# Altium PCB main.PcbDoc
Units mm, origin at the board's own origin, x right, y up, seen from the top; angles counter-clockwise.
Board outline 110.3 x 50.16 mm, 2 copper layers (Top Layer, Bottom Layer); 32 components, 29 nets, 111 pads, 8 vias.
Unrouted connection lines stored in the file: 1.
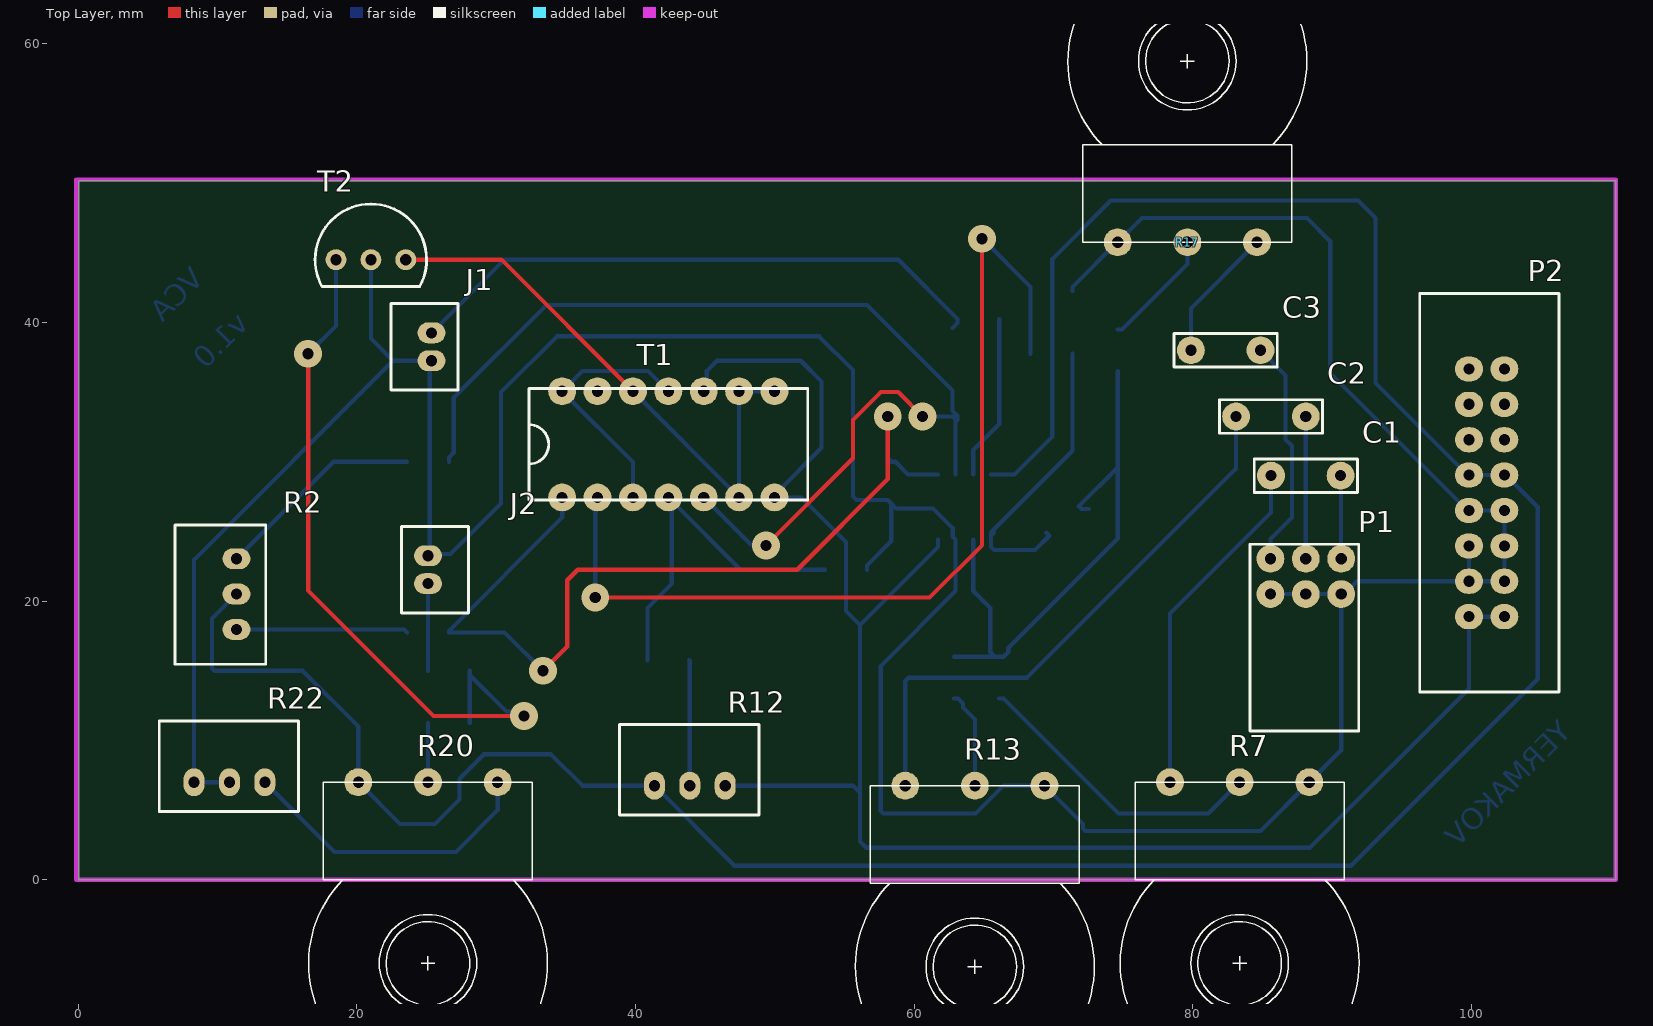
[diagram p0: Top Layer view]
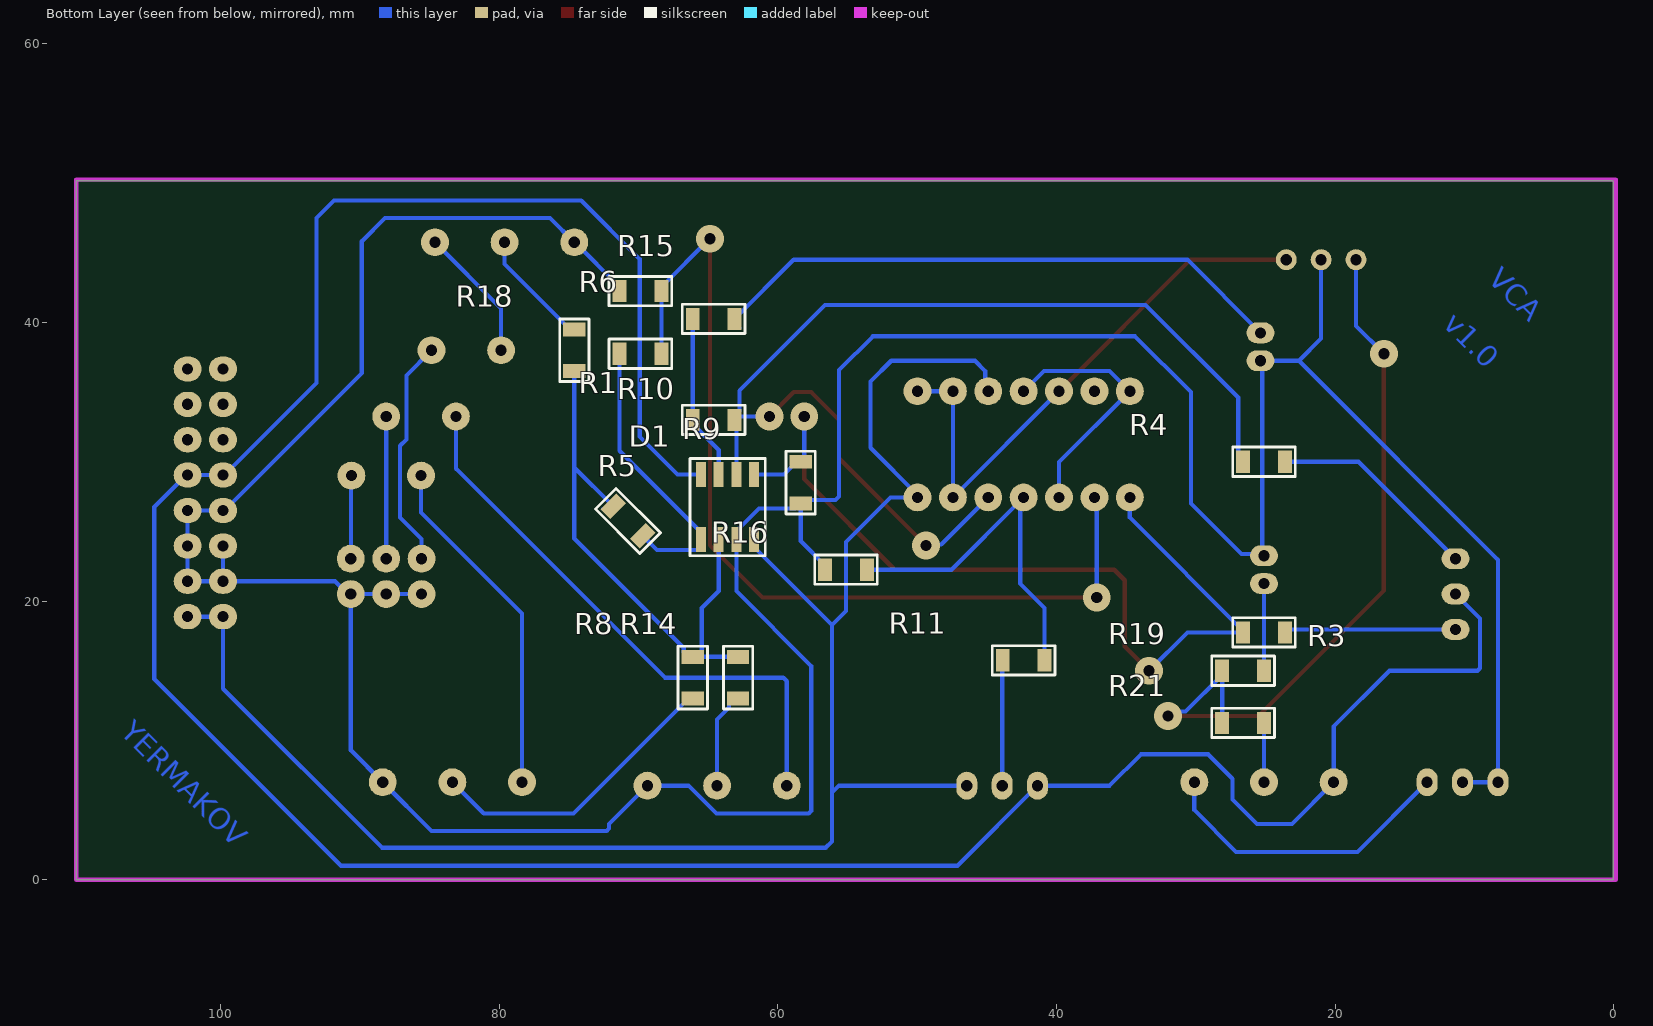
[diagram p1: Bottom Layer view, seen from below]

## Layer stack, top to bottom
Top Solder: solder mask 0.0102, Solder Resist, Dk 3.5
Top Layer: signal copper 0.0356
Dielectric 1: dielectric 0.32, FR-4, Dk 4.8
Bottom Layer: signal copper 0.0356
Bottom Solder: solder mask 0.0102, Solder Resist, Dk 3.5

## Board outline
110.35,0 110.35,50.165 0.05,50.165 0.05,0

## Design rules (kind name [scope] priority, off if disabled: settings)
Clearance [All] p1: gap=0.3 ignorepadtopadclearanceinfootprint=FALSE
PolygonConnect [All] p1: connectstyle=Relief reliefconductorwidth=0.254 reliefentries=4 polygonreliefangle="90 Angle" airgapwidth=0.254
RoutingVias [All] p1: holewidth=0.711 width=1.27 viastyle="Through Hole" minholewidth=0.711 minwidth=1.27 maxholewidth=0.711 maxwidth=1.27
SolderMaskExpansion [All] p1: expansion=0.102
Width [All] p1: maxlimit=0.3 minlimit=0.3 preferedwidth=0.3 minimp=50.000000 maximp=50.000000 favimp=50.000000
30 further rules are at their usual default settings.

## Components (designator, comment, footprint, x,y, rotation, side; value= is the part's Value field where it differs from the comment)
C1 "100n" "CAP DISK 5mm" 88.1,29 r270 top
C2 "100n" "CAP DISK 5mm" 85.6,33.25 r270 top
C3 "100n" "CAP DISK 5mm" 82.35,38 r270 top
D1 "TL062CDR" SOIC-8 63.6,26.75 r90 bottom
J1 "MW-2M" MW-2M 25.35,38.25 r0 top
J2 "MW-2M" MW-2M 25.1,22.25 r180 top
P1 "PLD-6R" PLD2.54-06R 88.1,21.77 r270 top
P2 "BH-16" BH-16 101.08,27.77 r180 top
R1 "130k" R1206 64.6,33 r0 bottom
R2 "5k" T93YA 11.35,17.96 r180 top
R3 "47k" R1206 25.1,17.75 r0 bottom
R4 "47k" R1206 25.1,30 r0 bottom
R5 "100k" R1206 70.75,25.75 r45 bottom
R6 "1k" R1206 64.6,40.25 r0 bottom
R7 "47k log" "potentiometr hor" 83.35,-6 r180 top
R8 "100k" R1206 66.1,14.5 r270 bottom
R9 "130k" R1206 58.35,28.5 r270 bottom
R10 "100k" R1206 69.85,37.75 r0 bottom
R11 "1M" R1206 42.35,15.75 r180 bottom
R12 "100k" T93YA 41.35,6.75 r90 top
R13 "47k log" "potentiometr hor" 64.35,-6.25 r180 top
R14 "100k" R1206 62.85,14.5 r270 bottom
R15 "220" R1206 69.85,42.25 r0 bottom
R16 "220" R1206 55.1,22.25 r0 bottom
R17 "47k log" "potentiometr hor" 79.6,58.75 r0 top
R18 "100k" R1206 74.6,38 r90 bottom
R19 "100k" R1206 26.6,15 r180 bottom
R20 "47k lin" "potentiometr hor" 25.1,-6 r180 top
R21 "100k" R1206 26.6,11.25 r180 bottom
R22 "4.7k" T93YA 8.31,7 r90 top
T1 "CA3086" DIP-14 42.35,31.25 r90 top
T2 "BC560" TO-92 21,44.5 r270 top

## Footprints (in the part's own frame and the unit in brackets; to place one, negate y for a bottom-side part, rotate by r counter-clockwise, add the part's x,y. Pads: shape width x height; smd on the part's side, far side on the other; paste and mask are expansions set on the pad)
BH-16 [mm]
  oval 2x1.8 hole 0.8: 1(-1.27,8.89) 2(-1.27,6.35) 3(-1.27,3.81) 4(-1.27,1.27) 5(-1.27,-1.27) 6(-1.27,-3.81) 7(-1.27,-6.35) 8(-1.27,-8.89) 9(1.27,-8.89) 10(1.27,-6.35) 11(1.27,-3.81) 12(1.27,-1.27) 13(1.27,1.27) 14(1.27,3.81) 15(1.27,6.35) 16(1.27,8.89)
  silkscreen extent -5.2,-14.3 4.8,14.3, body extent -4.7,-14 4.4,14, height 9.3
"CAP DISK 5mm" [mm]
  round 2 hole 0.8: 1(0,2.5) 2(0,-2.5)
  silkscreen extent -1.2,-3.7 1.2,3.7, body extent -1.59,-2.89 1.59,2.89, height 5
DIP-14 [mm]
  round 2 hole 0.8: 1(-3.81,7.62) 2(-3.81,5.08) 3(-3.81,2.54) 4(-3.81,0) 5(-3.81,-2.54) 6(-3.81,-5.08) 7(-3.81,-7.62) 8(3.81,-7.62) 9(3.81,-5.08) 10(3.81,-2.54) 11(3.81,0) 12(3.81,2.54) 13(3.81,5.08) 14(3.81,7.62)
  silkscreen extent -4,-10 4,10, body extent -3.81,-9.65 3.81,9.65, height 4.05
MW-2M [mm]
  oval 2x1.5 hole 0.8: 1(0,1) 2(0,-1)
  round 2 on Top Overlay: ""(-4.4,2.3)
  silkscreen extent -2.9,-3.1 1.9,3.1, body extent -2.75,-3 1.75,3, height 6
PLD2.54-06R [mm]
  round 2 hole 0.8: 1(-1.27,2.54) 2(1.27,2.54) 3(-1.27,0) 4(1.27,0) 5(-1.27,-2.54) 6(1.27,-2.54)
  silkscreen extent -2.3,-4 11.1,3.8, body extent -1.47,-3.92 11.07,3.7, height 5
"potentiometr hor" [mm]
  round 2 hole 0.8: 1(-5,-13) 2(0,-13) 3(5,-13)
  silkscreen extent -8.57,-13 8.57,8.57
R1206 [mm]
  rect 1x1.6 smd: 1(1.5,0) 2(-1.5,0)
  silkscreen extent -2.25,-1.05 2.25,1.05, body extent -1.6,-0.8 1.6,0.8, height 1
SOIC-8 [mm]
  rect 1.78x0.72 smd: 1(-2.34,1.905) 2(-2.34,0.635) 3(-2.34,-0.635) 4(-2.34,-1.905) 5(2.34,-1.905) 6(2.34,-0.635) 7(2.34,0.635) 8(2.34,1.905)
  round 1 on Bottom Overlay: ""(-4.4,2.6)
  silkscreen extent -3.5,-2.7 3.47,2.7, body extent -2.86,-2.44 2.92,2.46, height 1.45
T93YA [mm]
  oval 2x1.5 hole 0.8: 1(0,0) 2(0,-2.54) 3(0,-5.08)
  silkscreen extent -2.1,-7.5 4.4,2.5, body extent -1.91,-7.3 4.19,2.22, height 11.56
TO-92 [mm]
  round 1.5 hole 0.8: 1(0,2.5) 2(0,0) 3(0,-2.5)
  silkscreen extent -4,-4 1.92,4, body extent -2.61,-2.79 1.59,2.79, height 10

## Part data
C1 C2 C3: library part Capacitor
D1: library part TL062, Case=8SOIC, Manufacturer="Texas Instruments", HelpURL=https://www.digikey.com/product-detail/en/texas-instruments/TL062CDR/296-1281-1-ND/276549, Model=TL062CDR
P1: library part PLD2.54-06R, Model=PLD-6R
R1 R3 R4 R5 R6 R8 R9 R10 R11 R14 R15 R16 R18 R19 R21: library part Resistor
R2 R7 R12 R13 R17 R20 R22: library part Potentiometr
T1: "General Purpose NPN Transistor Array"
J1 J2: Model=MW-2M
P2: Model=BH-16

## Via types
v1: diameter 2, hole 0.8, Top Layer to Bottom Layer, 8 vias

## Nets (pads, with @x,y where several pads share a name; then routed paths per layer and width w, separated by ;. In a path a pad name is that pad's centre, name@x,y a point inside that pad or via, vN(x,y) a via of type N, cw(c..) or ccw(c..) an arc to the next point about the centre after c; other vN are vias at no path point)
+12: D1.8 P2.5 P2.12 R2.2 R12.1 R20.3 | length 203.2
  Bottom Layer w0.3: R2.2 9.6,18.75 9.6,15.176 9.776,15 16.1,15 20.1,11 R20.3 23.1,4 25.6,4 27.35,5.75 27.35,7.25 29.1,9 33.938,9 36.188,6.75 R12.1 47.1,1 91.35,1 104.75,14.4 104.75,26.74 102.45,29.04 P2.5 P2.12 99.71,29.04 93.1,35.65 93.1,47.5 91.85,48.75 74.1,48.75 69.908,44.558 69.908,31.808 67.19,29.09 D1.8
-12: D1.4 P2.1 P2.16 R12.3 T1.7 T1.10 T1.13 | length 123.4
  Bottom Layer w0.3: T1.10 45.11,35.28 45.11,36.51 45.85,37.25 51.85,37.25 53.35,35.75 53.35,31 49.97,27.62 T1.7 51.91,27.44 55.1,24.25 55.1,19.285 56.1,18.285 ; R12.3 55.6,6.75 56.1,6.25 ; D1.4 61.695,23.88 56.1,18.285 ; P2.1 P2.16 99.81,13.71 88.4,2.3 56.55,2.3 56.1,2.75 56.1,6.25 ; 56.1,6.25 56.1,18.285
GND: D1.3 J1.2 J2.2 P1.2 P1.4 P1.6 P2.2 P2.3 P2.4 P2.13 P2.14 P2.15 R7.1 R9.1 R13.1 R15.1 R16.1 R17.1 R22.1 R22.2 T2.2 | length 272.7
  Bottom Layer w0.3: R22.2 R22.1 8.31,22.96 22.6,37.25 ; T2.2 21,38.85 22.6,37.25 ; J2.2 J2.2@25.225,23.375 ; R16.1 56.6,22.55 58.35,24.3 R9.1 ; R15.1 71.35,42.55 74.55,45.75 R17.1 76.35,47.5 88.174,47.5 89.85,45.824 89.85,36.36 99.71,26.5 P2.13 P2.4 P2.3 P2.2 P2.15 ; P1.6 P1.4 P1.2 ; P2.14 P2.15 ; 22.6,37.25 J1.2 25.225,37.125 J2.2@25.225,23.375 ; J2.2@25.225,23.375 26.725,23.375 30.35,27 30.35,35 34.35,39 53.174,39 55.6,36.574 55.6,27.5 55.85,27.25 58.1,27.25 R9.1 ; R9.1 58.7,26.65 61.341,26.65 62.755,25.236 62.755,24.62 D1.3 62.965,20.715 57.6,15.35 57.6,4.926 57.776,4.75 64.401,4.75 66.401,6.75 R13.1 72.1,4 72.1,3.676 72.276,3.5 84.85,3.5 R7.1 90.64,9.29 P1.2 ; P1.2 90.851,20.5 91.771,21.42 P2.15
NetC1_1: C1.1 P1.1 | length 6
  Bottom Layer w0.3: C1.1 90.62,28.98 90.62,23.06 P1.1
NetC1_2: C1.2 R7.3 | length 25
  Bottom Layer w0.3: R7.3 78.35,19.099 85.6,26.349 C1.2
NetC2_1: C2.1 P1.3 | length 10.2
  Bottom Layer w0.3: P1.3 C2.1
NetC2_2: C2.2 R13.3 | length 41.3
  Bottom Layer w0.3: R13.3 59.35,14.25 59.6,14.5 68.1,14.5 83.1,29.5 C2.2
NetC3_1: C3.1 P1.5 | length 16.5
  Bottom Layer w0.3: C3.1 86.65,36.2 86.65,31.595 87.1,31.145 87.1,26 85.56,24.46 P1.5
NetC3_2: C3.2 R17.3 | length 9.7
  Bottom Layer w0.3: C3.2 79.85,41 R17.3
NetD1_1: D1.1 R5.2 R10.1 | length 21.6
  Bottom Layer w0.3: D1.1@65.715,24.901 D1.1@65.505,24.691 ; R5.2@69.477,24.901 R5.2 68.67,23.67 65.715,23.67 65.505,23.88 D1.1 D1.1@65.505,24.691 ; R10.1 71.35,30.785 65.505,24.94 D1.1@65.505,24.691
NetD1_2: D1.2 R5.1 R8.2 R14.2 R18.2 | length 41.2
  Bottom Layer w0.3: R14.2 R8.2@65.8,16 ; D1.2 64.235,20.722 65.45,19.507 65.45,16.35 R8.2@65.8,16 ; R5.1@72.518,26.599 72.023,26.599 R5.1 74.6,29.6 ; R18.2 74.6,29.6 ; R8.2@65.8,16 R8.2 66.4,16 66.75,16.35 66.75,16.65 74.6,24.5 74.6,29.6
NetD1_5: D1.5 R3.1 R9.2 T1.1 | length 65.8
  Top Layer w0.3: v1(33.35,15) 35.093,16.743 35.093,21.493 35.85,22.25 51.6,22.25 58.1,28.75 v1(58.1,33.25)
  Bottom Layer w0.3: v1(33.35,15) 30.6,17.75 R3.1 26.6,17.86 34.73,25.99 T1.1 ; v1(58.1,33.25) 58.1,30.25 R9.2 58.65,30 59.56,29.09 D1.5
NetD1_6: D1.6 R1.2 R4.1 T1.5 | length 78.7
  Top Layer w0.3: v1(49.35,24) 55.6,30.25 55.6,33 57.6,35 58.85,35 v1(60.6,33.25)
  Bottom Layer w0.3: R4.1 26.6,30.3 26.95,30.65 26.95,34.6 33.6,41.25 56.6,41.25 62.75,35.1 62.75,33.65 63.1,33.3 R1.2 R1.2@62.965,32.865 ; T1.5 48.265,24.065 49.285,24.065 v1(49.35,24) ; v1(60.6,33.25) 62.75,33.25 62.965,33.035 R1.2@62.965,32.865 ; D1.6 R1.2@62.965,32.865
NetD1_7: D1.7 R1.1 R6.1 | length 11.9
  Bottom Layer w0.3: D1.7 64.235,30.835 66.1,32.7 R1.1 R6.1
NetJ1_1: J1.1 R6.2 | length 42.5
  Bottom Layer w0.3: J1.1 30.6,44.5 58.85,44.5 R6.2 63.1,39.95 R6.2@62.75,39.6
NetJ2_1: J2.1 R19.1 | length 6.3
  Bottom Layer w0.3: R19.1 J2.1
NetR2_1: R2.1 R3.2 | length 12.3
  Bottom Layer w0.3: R2.1 23.39,17.96 R3.2
NetR2_3: R2.3 R4.2 | length 15.1
  Bottom Layer w0.3: R2.3 18.31,30 R4.2
NetR7_2: R7.2 R8.1 | length 21.6
  Bottom Layer w0.3: R8.1 66.4,13 74.65,4.75 81.1,4.75 R7.2
NetR10_2: R10.2 R15.2 T1.2 | length 68.3
  Top Layer w0.3: v1(37.1,20.25) 61.1,20.25 64.85,24 v1(64.85,46)
  Bottom Layer w0.3: v1(37.1,20.25) 37.1,27.27 T1.2 ; v1(64.85,46) 64.9,46 68.35,42.55 R15.2 R10.2
NetR11_1: R11.1 R16.2 T1.4 | length 25.6
  Bottom Layer w0.3: R11.1 40.85,19.5 42.6,21.25 T1.4@42.6,27.19 ; T1.4 T1.4@42.6,27.19 ; R16.2 47.54,22.25 T1.4@42.6,27.19
NetR11_2: R11.2 R12.2 | length 9
  Bottom Layer w0.3: R11.2 43.89,15.71 R12.2
NetR13_2: R13.2 R14.1 | length 7
  Bottom Layer w0.3: R14.1 63.15,13 63.5,12.65 63.5,12.35 64.35,11.5 R13.2
NetR17_2: R17.2 R18.1 | length 8.5
  Bottom Layer w0.3: R18.1 74.9,39.5 79.6,44.2 R17.2
NetR19_2: R19.2 R21.2 T2.3 | length 52.7
  Top Layer w0.3: v1(16.5,37.75) 16.5,20.75 25.5,11.75 v1(32,11.75)
  Bottom Layer w0.3: v1(16.5,37.75) 18.5,39.75 T2.3 ; R21.2 28.1,14.7 30.725,12.075 31.675,12.075 v1(32,11.75) ; R19.2@28.1,14.7 R19.2
NetR20_1: R20.1 R22.3 | length 22
  Bottom Layer w0.3: R22.3 18.39,2 27.1,2 30.1,5 R20.1
NetR20_2: R20.2 R21.1 | length 4.3
  Bottom Layer w0.3: R20.2 R21.1
NetT1_3: T1.3 T1.11 T1.14 | length 18.5
  Bottom Layer w0.3: T1.3 39.81,29.98 T1.14 36.18,36.51 40.9,36.51 T1.11
NetT1_6: T1.6 T1.8 T1.9 T1.12 T2.1 | length 41.2
  Top Layer w0.3: T2.1 30.37,44.5 T1.12
  Bottom Layer w0.3: T1.12 T1.6 T1.9 T1.8
pads on no net: D1. J1. J2. P2.6 P2.7 P2.8 P2.9 P2.10 P2.11

## Polygon pours and split planes (outlines as drawn)
no net on Mechanical 2 (solid): -1.9,-5 -1.9,55 113.5,55 113.5,-5

## Keep-outs
Keep-Out Layer:
  lines w0.3: -0.15,0 110.35,0 110.35,50.25 -0.15,50.25 -0.15,0

## Other copper
Bottom Layer:
  text "VCA /  / v1.0" at 12.35,39.8 h1.52 r45
  text "YERMAKOV" at 107.25,10.5 h1.52 r45